# Altium PCB Intermediate_LCL_Revised.PcbDoc
Units mil, origin at the board's own origin, x right, y up, seen from the top; angles counter-clockwise.
Board outline 12850 x 6950 mil, 2 copper layers (Top Layer, Bottom Layer); 80 components, 67 nets, 326 pads, 24 vias.
Unrouted connection lines stored in the file: 23.
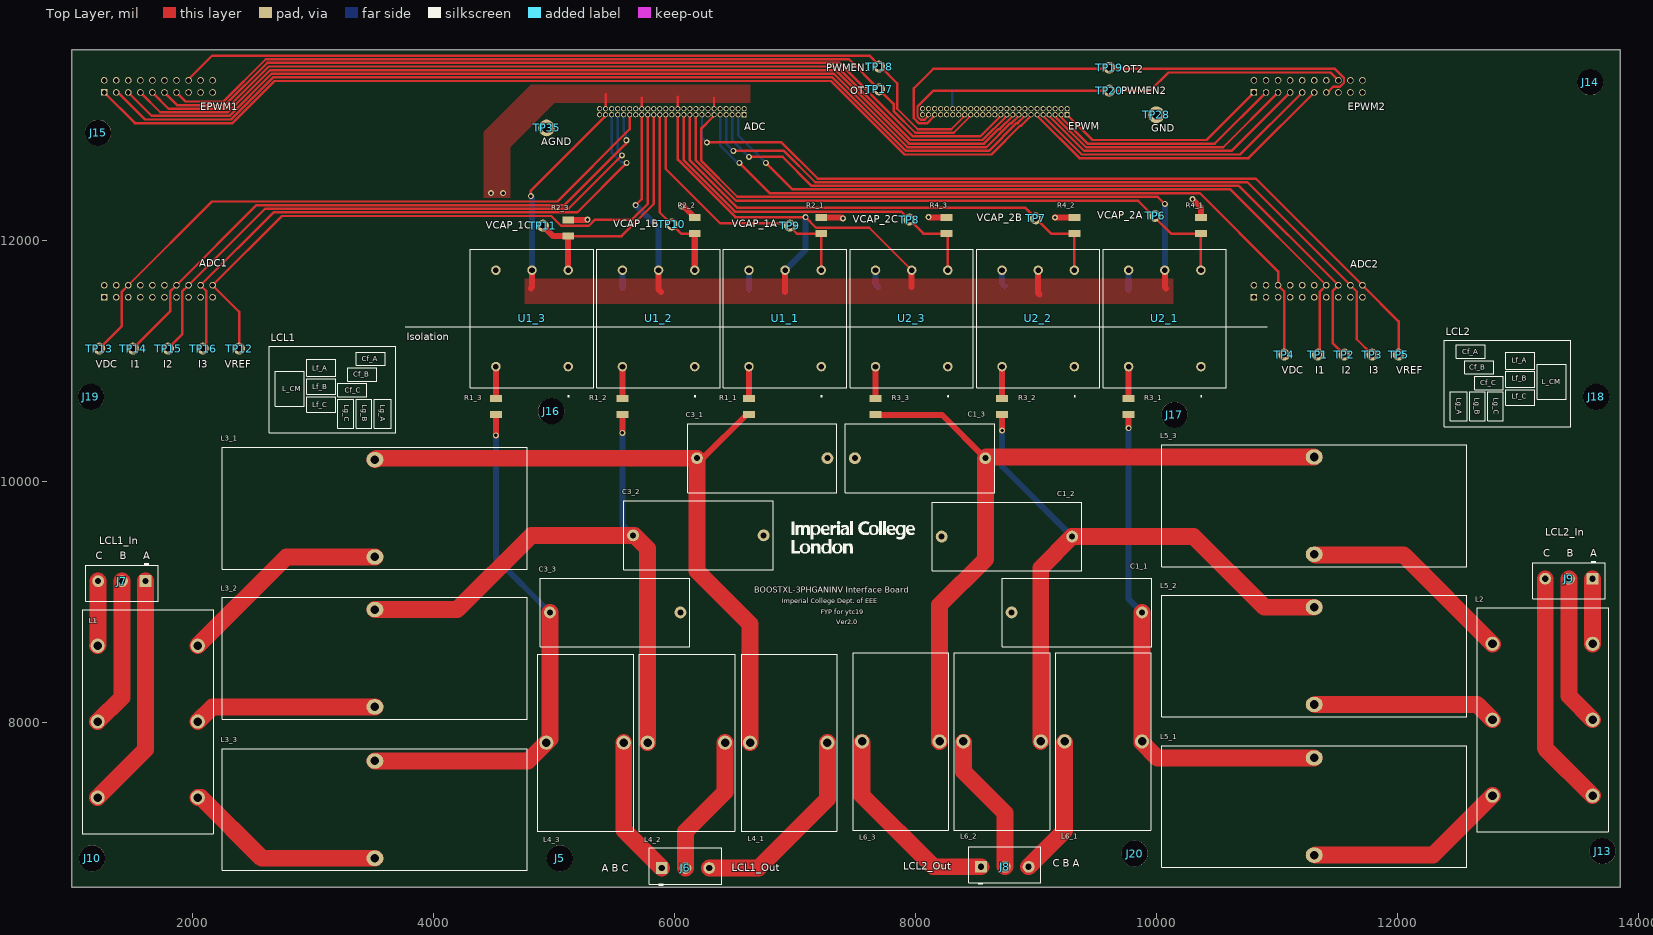
[diagram p0: Top Layer view]
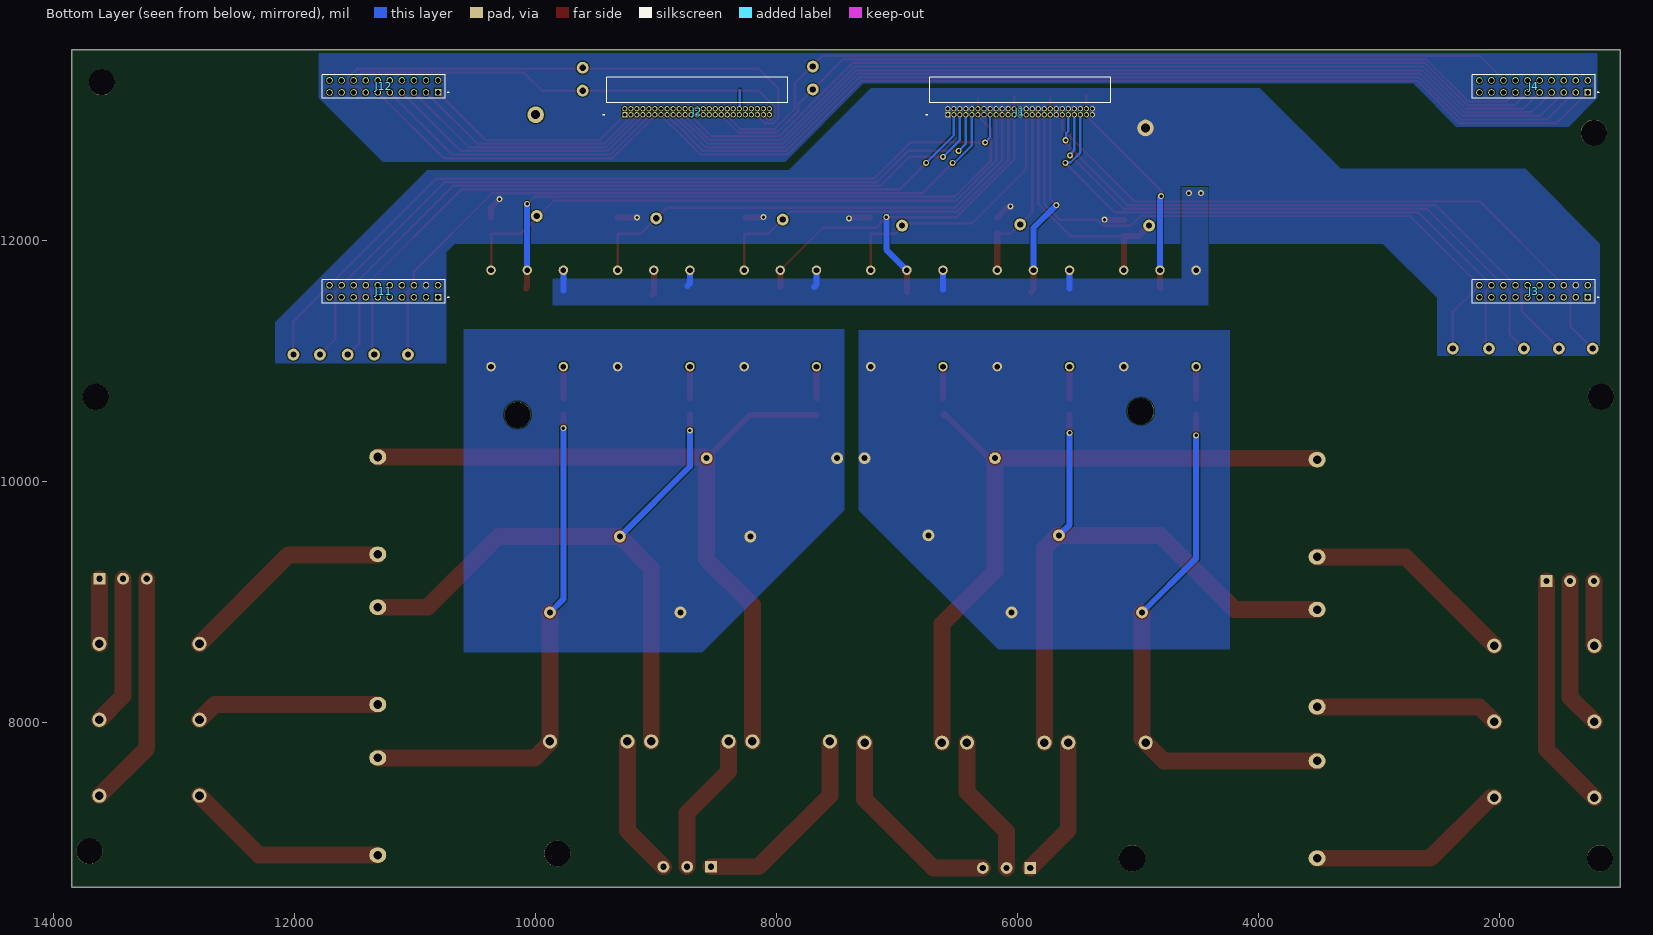
[diagram p1: Bottom Layer view, seen from below]
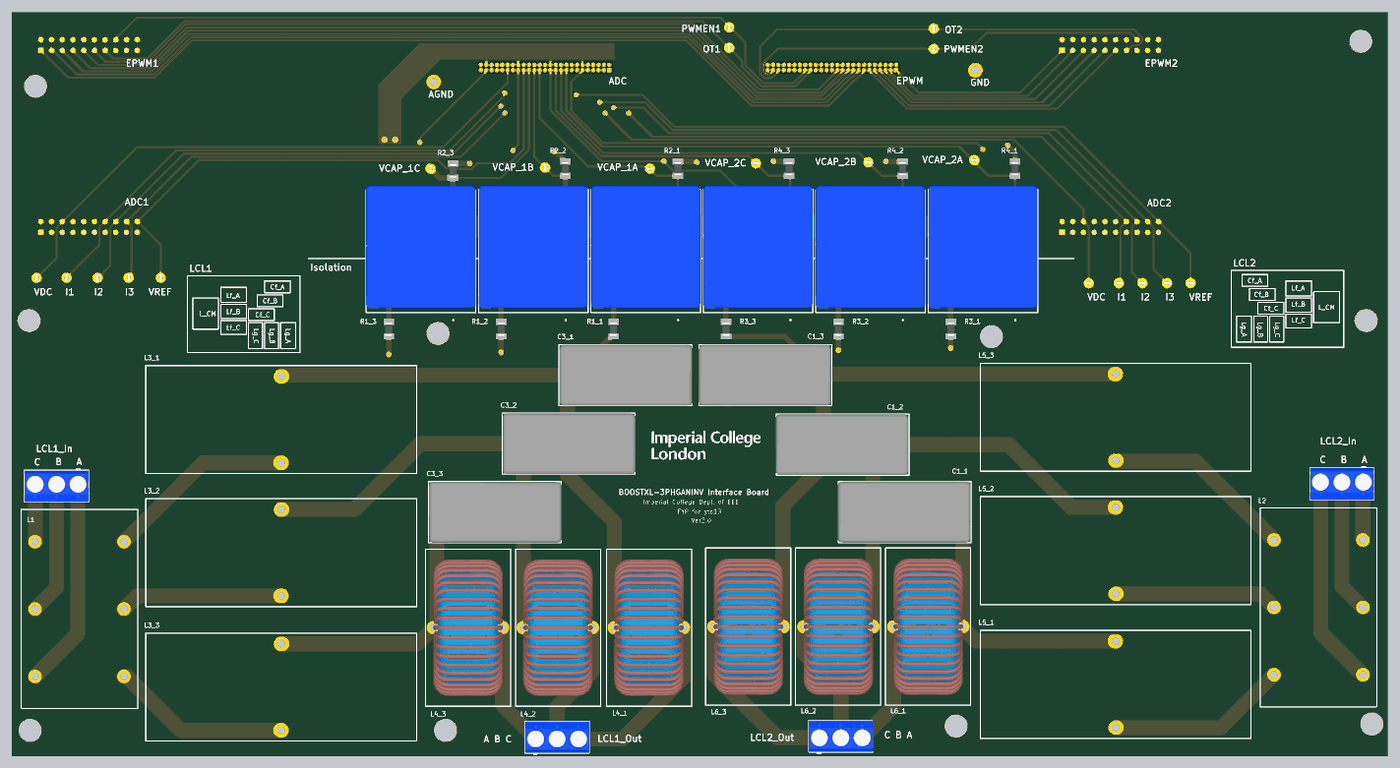
[diagram p2: 3D render of the assembled board from above, using the file's embedded part models]
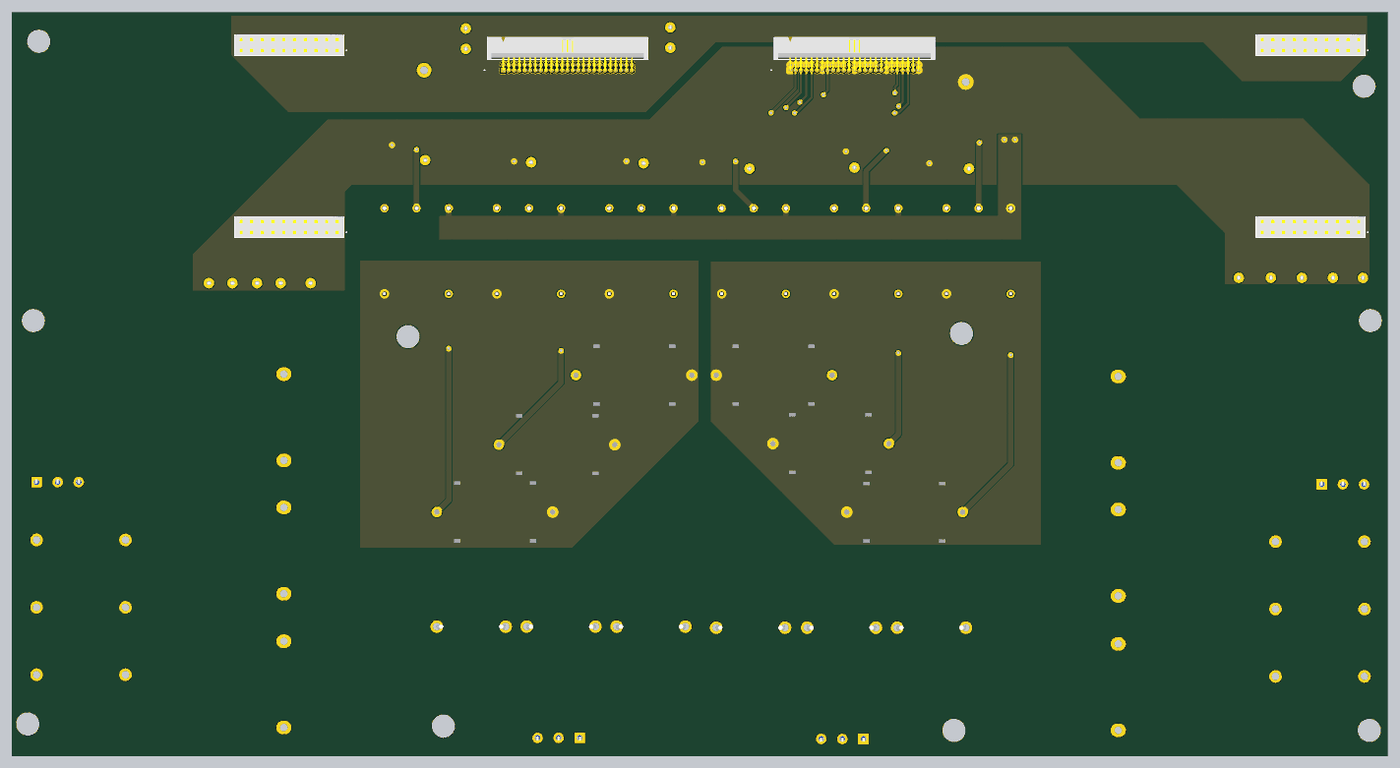
[diagram p3: 3D render of the assembled board from below, using the file's embedded part models]

## Layer stack, top to bottom
Top Solder: solder mask 0.4, Solder Resist, Dk 3.5
Top Layer: signal copper 1.4
Dielectric 1: dielectric 12.6, FR-4, Dk 4.8
Bottom Layer: signal copper 1.4
Bottom Solder: solder mask 0.4, Solder Resist, Dk 3.5

## Board outline
1000,6630 13850,6630 13850,13580 1000,13580

## Design rules (kind name [scope] priority, off if disabled: settings)
Clearance [All] p1: gap=10 ignorepadtopadclearanceinfootprint=FALSE except(0: Arc-Hole Track-Hole SMDPad-Hole THPad-Hole Via-Hole Fill-Hole Poly-Hole Region-Hole Text-Hole; 5: SMDPad-SMDPad SMDPad-THPad THPad-THPad)
Height [All] p1: minheight=0 maxheight=1500 prefheight=500
HoleSize [All] p1: absolutevalues=TRUE maxlimit=150 minlimit=1 maxpercent=80.000 minpercent=20.000
PolygonConnect [All] p1: connectstyle=Direct reliefconductorwidth=10 reliefentries=4 polygonreliefangle="90 Angle" airgapwidth=10
RoutingVias [All] p1: holewidth=28 width=50 viastyle="Through Hole" minholewidth=28 minwidth=50 maxholewidth=28 maxwidth=50
SolderMaskExpansion [All] p1: expansion=4 istentingtop=FALSE
Width [All] p1: maxlimit=140 minlimit=10 preferedwidth=10 minimp=50.000000 maximp=50.000000 favimp=50.000000
28 further rules are at their usual default settings.

## Classes and differential pairs
channel class LCL_2: LCL_21 LCL_22 LCL_23
net class V_termB_[1..3]: V_termB_1 V_termB_2 V_termB_3
net class V_termA_[1..3]: V_termA_1 V_termA_2 V_termA_3
net class V_o_outB_[1..3]: V_o_outB_1 V_o_outB_2 V_o_outB_3
net class V_o_outA_[1..3]: V_o_outA_1 V_o_outA_2 V_o_outA_3
net class V_capB_[1..3]: V_capB_1 V_capB_2 V_capB_3
net class V_capA_[1..3]: V_capA_1 V_capA_2 V_capA_3
component class LCL_23: C1_3 L5_3 L6_3 R3_3 R4_3 U2_3
component class LCL_22: C1_2 L5_2 L6_2 R3_2 R4_2 U2_2
component class LCL_21: C1_1 L5_1 L6_1 R3_1 R4_1 U2_1
channel class LCL_1: LCL_11 LCL_12 LCL_13
component class LCL_13: C3_3 C23 C33 L3_3 L4_3 R1_3 R2_3 R13 R33 R43 R53 U1_3
component class LCL_12: C3_2 C22 C32 L3_2 L4_2 R1_2 R2_2 R12 R32 R42 R52 U1_2
component class LCL_11: C3_1 C21 C31 L3_1 L4_1 R1_1 R2_1 R11 R31 R41 R51 U1_1
component class Intermediate_LCL_Top_20230320: J1 J2 J3 J4 J5 J6 J7 J8 J9 J10 J11 J12 J13 J14 J15 J16 J17 J18 J19 J20 L1 L2 TP1 TP2 TP3 TP4 TP5 TP6 TP7 TP8 TP9 TP10 TP11 TP12 TP13 TP14 TP15 TP16 TP17 TP18 TP19 TP20 TP28 TP35

## Components (designator, comment, footprint, x,y, rotation, side; value= is the part's Value field where it differs from the comment)
C1_1 "2.2uF_180V" "Film Capacitor PHE450HF7220JR06L2" 9340,8910 r90 top (schematic designator C1)
C1_2 "2.2uF_180V" "Film Capacitor PHE450HF7220JR06L2" 8760,9540 r90 top (schematic designator C1)
C1_3 "2.2uF_180V" "Film Capacitor PHE450HF7220JR06L2" 8040,10190 r90 top (schematic designator C1)
C3_1 "2.2uF_180V" "Film Capacitor PHE450HF7220JR06L2" 6730,10190 r270 top (schematic designator C3)
C3_2 "2.2uF_180V" "Film Capacitor PHE450HF7220JR06L2" 6200,9550 r270 top (schematic designator C3)
C3_3 "2.2uF_180V" "Film Capacitor PHE450HF7220JR06L2" 5510,8910 r270 top (schematic designator C3)
J1 "ADC" SHF-125-01-L-D-RA 5980,13065 r180 bottom
J2 "EPWM" SHF-125-01-L-D-RA 8660,13065 r180 bottom
J3 "ADC1" SSQ-110-03-T-D 1720,11575 r180 bottom
J4 "EPWM1" SSQ-110-03-T-D 1720,13275 r180 bottom
J5 "M5 Mounting Hole" "M5 Mounting Hole" 5050,6870 r0 top
J6 "LCL1_Out" "3 Pin Terminal" 6093.15,6790 r0 top
J7 "LCL1_In" "3 Pin Terminal" 1416.85,9170 r180 top
J8 "LCL2_Out" "3 Pin Terminal" 8743.15,6800 r0 top
J9 "LCL2_In" "3 Pin Terminal" 13423.15,9190 r180 top
J10 "M5 Mounting Hole" "M5 Mounting Hole" 1170,6870 r0 top
J11 "ADC2" SSQ-110-03-T-D 11260,11575 r180 bottom
J12 "EPWM2" SSQ-110-03-T-D 11260,13275 r180 bottom
J13 "M5 Mounting Hole" "M5 Mounting Hole" 13702.78,6929.75 r0 top
J14 "M5 Mounting Hole" "M5 Mounting Hole" 13600,13310 r0 top
J15 "M5 Mounting Hole" "M5 Mounting Hole" 1220,12890 r0 top
J16 "M5 Mounting Hole" "M5 Mounting Hole" 4980,10580 r0 top
J17 "M5 Mounting Hole" "M5 Mounting Hole" 10150,10550 r0 top
J18 "M5 Mounting Hole" "M5 Mounting Hole" 13650,10700 r0 top
J19 "M5 Mounting Hole" "M5 Mounting Hole" 1160,10700 r0 top
J20 "M5 Mounting Hole" "M5 Mounting Hole" 9820,6910 r0 top
L1 "30mH CM" "CM Choke Custom" 1631.06,8004.39 r0 top
L2 "30mH CM" "CM Choke Custom" 13204.65,8020 r180 top
L3_1 "4mH" "4mH Custom" 3515.71,9774.39 r90 top (schematic designator L3)
L3_2 "4mH" "4mH Custom" 3515.71,8530.84 r90 top (schematic designator L3)
L3_3 "4mH" "4mH Custom" 3515.71,7274.39 r90 top (schematic designator L3)
L4_1 "380uH" "380uH Custom" 6950,7830 r0 top (schematic designator L4)
L4_2 "380uH" "380uH Custom" 6100,7830 r0 top (schematic designator L4)
L4_3 "380uH" "380uH Custom" 5260,7830 r0 top (schematic designator L4)
L5_1 "4mH" "4mH Custom" 11310,7300 r90 top (schematic designator L5)
L5_2 "4mH" "4mH Custom" 11310,8550 r90 top (schematic designator L5)
L5_3 "4mH" "4mH Custom" 11310,9796.46 r90 top (schematic designator L5)
L6_1 "380uH" "380uH Custom" 9560,7840 r180 top (schematic designator L6)
L6_2 "380uH" "380uH Custom" 8720,7840 r180 top (schematic designator L6)
L6_3 "380uH" "380uH Custom" 7880,7840 r180 top (schematic designator L6)
R1_1 "8.2k_1206" "1206 Resistor" 6620,10620 r270 top (schematic designator R1)
R1_2 "8.2k_1206" "1206 Resistor" 5570,10620 r270 top (schematic designator R1)
R1_3 "8.2k_1206" "1206 Resistor" 4520,10620 r270 top (schematic designator R1)
R2_1 "130_1206" "1206 Resistor" 7220,12120 r270 top (schematic designator R2)
R2_2 "130_1206" "1206 Resistor" 6170,12120 r270 top (schematic designator R2)
R2_3 "130_1206" "1206 Resistor" 5120,12100 r270 top (schematic designator R2)
R3_1 "8.2k_1206" "1206 Resistor" 9770,10620 r270 top (schematic designator R3)
R3_2 "8.2k_1206" "1206 Resistor" 8720,10620 r270 top (schematic designator R3)
R3_3 "8.2k_1206" "1206 Resistor" 7670,10620 r270 top (schematic designator R3)
R4_1 "130_1206" "1206 Resistor" 10370,12120 r270 top (schematic designator R4)
R4_2 "130_1206" "1206 Resistor" 9320,12120 r270 top (schematic designator R4)
R4_3 "130_1206" "1206 Resistor" 8260,12120 r270 top (schematic designator R4)
TP1 "PCBTestpoint" "PCB 1.32mm TestPoint" 11340,11050 r0 top
TP2 "PCBTestpoint" "PCB 1.32mm TestPoint" 11560,11050 r0 top
TP3 "PCBTestpoint" "PCB 1.32mm TestPoint" 11790,11050 r0 top
TP4 "PCBTestpoint" "PCB 1.32mm TestPoint" 11060,11050 r0 top
TP5 "PCBTestpoint" "PCB 1.32mm TestPoint" 12010,11050 r0 top
TP6 "VCAP_2A" "PCB 1.32mm TestPoint" 9990,12200 r0 top
TP7 "VCAP_2B" "PCB 1.32mm TestPoint" 9000,12180 r0 top
TP8 "VCAP_2C" "PCB 1.32mm TestPoint" 7950,12170 r0 top
TP9 "VCAP_1A" "PCB 1.32mm TestPoint" 6960,12120 r0 top
TP10 "VCAP_1B" "PCB 1.32mm TestPoint" 5980,12130 r90 top
TP11 "VCAP_1C" "PCB 1.32mm TestPoint" 4910,12120 r90 top
TP12 "PCBTestpoint" "PCB 1.32mm TestPoint" 2390,11100 r90 top
TP13 "PCBTestpoint" "PCB 1.32mm TestPoint" 1230,11100 r90 top
TP14 "PCBTestpoint" "PCB 1.32mm TestPoint" 1510,11100 r90 top
TP15 "PCBTestpoint" "PCB 1.32mm TestPoint" 1800,11100 r90 top
TP16 "PCBTestpoint" "PCB 1.32mm TestPoint" 2090,11100 r90 top
TP17 "OT1" "PCB 1.32mm TestPoint" 7700,13250 r90 top
TP18 "PWMEN1" "PCB 1.32mm TestPoint" 7700,13440 r90 top
TP19 "OT2" "PCB 1.32mm TestPoint" 9610,13430 r90 top
TP20 "PWMEN2" "PCB 1.32mm TestPoint" 9610,13240 r90 top
TP28 "GND" "1.9mm Hole" 10000,13040 r90 top
TP35 "AGND" "1.9mm Hole" 4940,12930 r90 top
U1_1 "LV25P" LV-25-P 6920,11350 r90 top (schematic designator U1)
U1_2 "LV25P" LV-25-P 5870,11350 r90 top (schematic designator U1)
U1_3 "LV25P" LV-25-P 4820,11350 r90 top (schematic designator U1)
U2_1 "LV25P" LV-25-P 10070,11350 r90 top (schematic designator U2)
U2_2 "LV25P" LV-25-P 9020,11350 r90 top (schematic designator U2)
U2_3 "LV25P" LV-25-P 7970,11350 r90 top (schematic designator U2)

## Footprints (in the part's own frame and the unit in brackets; to place one, negate y for a bottom-side part, rotate by r counter-clockwise, add the part's x,y. Pads: shape width x height; smd on the part's side, far side on the other; paste and mask are expansions set on the pad)
"1.9mm Hole" [mm] "Through hole terminal pin"
  round 3.5 hole 1.9: 1(0,0)
"3 Pin Terminal" [mm] "WURTH ELEKTRONIK 691102710003"
  rect 2.5x2.5 hole 1.3: 1(-5,0)
  round 2.5 hole 1.3: 2(0,0) 3(5,0)
  silkscreen extent -7.63,-3.78 7.61,4.22, body extent -7.63,-3.3 7.61,4.2, height 10
"4mH Custom" [mm] "4mH Custom"
  oval 3.2x3.6 hole 1.8: 1(-10.25,0) 2(10.25,0)
  silkscreen extent -12.83,-32.13 12.83,32.13
"380uH Custom" [mm] "380uH Custom"
  round 3 hole 1.8: 1(-8.16,0) 2(8.16,0)
  silkscreen extent -10.03,-18.67 10.16,18.67, body extent -8.25,-16.21 8.25,16.21, height 34.1
"1206 Resistor" [mm]
  rect 1.5x2.5 smd: 1(-1.7,0) 2(1.7,0)
  body extent -1.55,-0.8 1.55,0.8, height 0.65
"CM Choke Custom" [mm] "CM Choke Custom"
  round 3 hole 1.8: 1(-10.55,16) 2(-10.55,0) 3(-10.55,-16) 4(10.55,16) 5(10.55,0) 6(10.55,-16)
  silkscreen extent -13.84,-23.62 13.84,23.62
"Film Capacitor PHE450HF7220JR06L2" [mm] "KEMET PHE450 Metallised Polypropylene Film Capacitor, 180 V ac, 250 V dc, ±5%, 2.2µF, Through Hole"
  round 2.5 hole 1.27: 1(0,13.75) 2(0,-13.75)
  silkscreen extent -7.25,-15.75 7.25,15.75, body extent -7.24,-15.62 7.26,15.88, height 24.01
LV-25-P [mm]
  round 2 hole 1.2: 1(-10.16,-7.62) 2(10.16,-7.62) 3(10.16,0) 4(10.16,7.62) 5(-10.16,7.62)
  silkscreen extent -16.54,-13 14.6,13, body extent -13.6,-13 15.6,13, height 16.4
"M5 Mounting Hole" [mm] "M5 Mounting Hole"
  round 5.5 hole 5.5: 1(0,0)
"PCB 1.32mm TestPoint" [mm] "20-313143 PCB Test Point, White, Through Hole Mount, 1.32 mm, Phosphor Bronze, Tin Plated Contacts"
  round 2.5 hole 1.32: 1(0,0)
  body extent -1.15,-1.15 1.15,1.15, height 5
SHF-125-01-L-D-RA [mm] "50-Pin Simplus Connector"
  rect 1.09x1.09 hole 0.74 mask+0.381: 01(-15.24,-0.635)
  round 1.09 hole 0.74 mask+0.381: 02(-15.24,0.635) 03(-13.97,-0.635) 04(-13.97,0.635) 05(-12.7,-0.635) 06(-12.7,0.635) 07(-11.43,-0.635) 08(-11.43,0.635) 09(-10.16,-0.635) 10(-10.16,0.635) 11(-8.89,-0.635) 12(-8.89,0.635) 13(-7.62,-0.635) 14(-7.62,0.635) 15(-6.35,-0.635) 16(-6.35,0.635) 17(-5.08,-0.635) 18(-5.08,0.635) 19(-3.81,-0.635) 20(-3.81,0.635) 21(-2.54,-0.635) 22(-2.54,0.635) 23(-1.27,-0.635) 24(-1.27,0.635) 25(0,-0.635) 26(0,0.635) 27(1.27,-0.635) 28(1.27,0.635) 29(2.54,-0.635) 30(2.54,0.635) 31(3.81,-0.635) 32(3.81,0.635) 33(5.08,-0.635) 34(5.08,0.635) 35(6.35,-0.635) 36(6.35,0.635) 37(7.62,-0.635) 38(7.62,0.635) 39(8.89,-0.635) 40(8.89,0.635) 41(10.16,-0.635) 42(10.16,0.635) 43(11.43,-0.635) 44(11.43,0.635) 45(12.7,-0.635) 46(12.7,0.635) 47(13.97,-0.635) 48(13.97,0.635) 49(15.24,-0.635) 50(15.24,0.635)
  silkscreen extent -19.8,-0.73 19.05,7.23, body extent -19.05,-0.84 19.05,7.24, height 5.59
SSQ-110-03-T-D [mm] "Headers & Wire Housings Tiger Buy Socket Strip with Square Tails, 0.100\" Pitch"
  rect 1.37x1.37 hole 1.02: 01(11.43,-1.27)
  round 1.37 hole 1.02: 02(11.43,1.27) 03(8.89,-1.27) 04(8.89,1.27) 05(6.35,-1.27) 06(6.35,1.27) 07(3.81,-1.27) 08(3.81,1.27) 09(1.27,-1.27) 10(1.27,1.27) 11(-1.27,-1.27) 12(-1.27,1.27) 13(-3.81,-1.27) 14(-3.81,1.27) 15(-6.35,-1.27) 16(-6.35,1.27) 17(-8.89,-1.27) 18(-8.89,1.27) 19(-11.43,-1.27) 20(-11.43,1.27)
  silkscreen extent -12.96,-2.47 13.7,2.47, body extent -12.95,-2.48 12.95,2.48, height 8.52

## Part data
C1_1 C1_2 C1_3 C3_1 C3_2 C3_3: library part PHE450HF7220JR06L2, "KEMET PHE450 Metallised Polypropylene Film Capacitor, 180 V ac, 250 V dc, ±5%, 2.2μF, Through Hole", Manufacturer_Name=KEMET, Datasheet Link=https://docs.rs-online.com/a458/0900766b817170df.pdf, Height=24.5mm, Manufacturer_Part_Number=PHE450HF7220JR06L2
J1 J2: library part SHF-125-01-L-D-RA, "50-Pin Simplus Connector", Package=None, Availability=Unavailable, MF=Samtec, MP=SHF-125-01-L-D-RA, Price=None
J3 J4 J11 J12: library part SSQ-110-03-T-D, "SSQ - Samtec 2.54mm Square Tail Dual Row Socket Strip 8.5mm Profile - Fast Stock", Package=None, Availability="In Stock", Check_prices=https://www.snapeda.com/parts/SSQ-110-03-T-D/Samtec%20Inc./view-part/616109/?ref=eda, MF="Samtec Inc.", MP=SSQ-110-03-T-D, Price=None, Purchase-URL=https://pricing.snapeda.com/search/part/SSQ-110-03-T-D/?ref=eda, SnapEDA_Link=https://www.snapeda.com/parts/SSQ-110-03-T-D/Samtec%20Inc./view-part/616109/?ref=snap
J6 J7 J8 J9: library part 3PinTerminal, "3 Position Terminal Block 5.08mm", Digikey Part Number=ED2610-ND, Manufacturer="On Shore Technology", Package=HDR03, Part Number=OSTTC032162, Temperature="-30°C to +105°C", Temperature Range High=+105°C, Temperature Range Low=-30°C, Voltage=300V, ComponentLink1Description=Upverter, ComponentLink1URL=https://upverter.com/upn/revision/2b80058b23306b34/, ComponentLink2Description=Datasheet, ComponentLink2URL=https://upverter.com/datasheet/d9a5d2e095ec14efdc364e45047c257fc4ca76eb.pdf, Digikey Description="CONN TERM BLOCK 5.08MM VERT 3POS PCB", helpURL=https://upverter.com/upn/revision/2b80058b23306b34/, Is Female=yes, Lead Free=yes, Price=0.382016875697, RoHS=TRUE, Supplier 1=Digi-Key, Supplier 2=Mouser, Supplier Part Number 1=ED2610-ND
L1 L2: library part "30mH Custom CM Choke", "30mH Custom CM Choke", Manufacturer_Name="Wurth Elektronik", Manufacturer_Part_Number=744839029220, Mouser Part Number=710-744839029220, Datasheet Link=https://componentsearchengine.com//744839029220.pdf, Height=39mm, Mouser Price/Stock=https://www.mouser.co.uk/ProductDetail/Wurth-Elektronik/744839029220?qs=MoCBKJu1Jj15mDhjF%2F4U%252Bg%3D%3D
L3_1 L3_2 L3_3 L5_1 L5_2 L5_3: library part "4mH Custom Inductor"
L4_1 L4_2 L4_3 L6_1 L6_2 L6_3: library part "380uH Custom Inductor"
R1_1 R1_2 R1_3 R3_1 R3_2 R3_3: library part CRG1206F8K2, "SMD Chip Resistor, 8.2 kohm, ± 5%, 500 mW, 1206 [3216 Metric], Thick Film, General Purpose", Package="6432 Stackpole", Availability=Good, DigiKey-Purchase-URL=https://snapeda.com/shop?store=DigiKey&id=836123, MF=Bourns, Mouser-Purchase-URL=https://snapeda.com/shop?store=Mouser&id=836123, MP=CRE2512-FZ-R007E-3, Price=None, SnapEDA_Link=https://www.snapeda.com/parts/CRE2512-FZ-R007E-3/Bourns/view-part/836123/?ref=snap
R2_1 R2_2 R2_3 R4_1 R4_2 R4_3: library part CRCW1206130RFKEA, "SMD Chip Resistor, 130 ohm, ± 1%, 250 mW, 1206 [3216 Metric], Thick Film, General Purpose", Package="6432 Stackpole", Availability=Good, DigiKey-Purchase-URL=https://snapeda.com/shop?store=DigiKey&id=836123, MF=Bourns, Mouser-Purchase-URL=https://snapeda.com/shop?store=Mouser&id=836123, MP=CRE2512-FZ-R007E-3, Price=None, SnapEDA_Link=https://www.snapeda.com/parts/CRE2512-FZ-R007E-3/Bourns/view-part/836123/?ref=snap
TP1 TP2 TP3 TP4 TP5 TP12 TP13 TP14 TP15 TP16: "20-313143 PCB Test Point, White, Through Hole Mount, 1.32 mm, Phosphor Bronze, Tin Plated Contacts"
TP6 TP7 TP8 TP9 TP10 TP11 TP17 TP18 TP19 TP20: library part PCBTestpoint, "20-313143 PCB Test Point, White, Through Hole Mount, 1.32 mm, Phosphor Bronze, Tin Plated Contacts"
TP28 TP35: library part GroundTestPoint, "H2182-01 PCB Test Point, PCB Mount, 1.9 mm, Brass, Tin Plated Contacts"
U1_1 U1_2 U1_3 U2_1 U2_2 U2_3: "Undefined or Miscellaneous", Manufacturer_Name=LEM, Manufacturer_Part_Number=LV25P

## Via types
v1: diameter 50, hole 28, Top Layer to Bottom Layer, 24 vias

## Nets (pads, with @x,y where several pads share a name; then routed paths per layer and width w, separated by ;. In a path a pad name is that pad's centre, name@x,y a point inside that pad or via, vN(x,y) a via of type N, cw(c..) or ccw(c..) an arc to the next point about the centre after c; other vN are vias at no path point)
+15V: J1.11 J1.23 J1.35 J1.47 U1_1.3 U1_2.3 U1_3.3 U2_1.3 U2_2.3 U2_3.3 | length 12138.1
  Top Layer w20: v1(4810,12365) 4810,12410 5421.46,13021.46 5421.46,13025.26 5430,13033.8 J1.47 ; v1(5680,12290) 5730,12340 J1.35 ; J1.23 6030,12667.57 6507.57,12190 v1(7090,12190) 7177.4,12102.6 7617.4,12102.6 U2_3.3 ; J1.11 6321.46,13040 6321.46,13022.83 6225,12926.37 6225,12657.43 6522.43,12360 10010,12360 v1(10070,12300)
  Top Layer w50: 4810,11600 4820,11610 U1_3.3 ; U1_2.3 5870,11590 5890,11570 ; 6920,11570 U1_1.3 ; 7970,11610 U2_3.3 ; U2_2.3 9020,11560 9030,11550 ; U2_1.3 10070,11610 10080,11600
  Bottom Layer w50: v1(4810,12365) 4820,12355 U1_3.3 ; v1(5680,12290) 5870,12100 U1_2.3 ; U1_1.3 7090,11920 v1(7090,12190) ; U2_1.3 v1(10070,12300)
-15V: J1.12 J1.24 J1.36 J1.48 U1_1.4 U1_2.4 U1_3.4 U2_1.4 U2_2.4 U2_3.4 | length 1166.6
  Top Layer w20: J1.48 5430,13210 ; J1.36 5730,13180 ; J1.24 6030,13190 ; J1.12 6330,13180
  Top Layer w50: U2_2.4 U2_2.4@8720.43,11749.57
  Bottom Layer w50: 5570,11600 U1_2.4 ; 6620,11590 U1_1.4 ; U2_3.4 7670,11630 7690,11610 ; U2_2.4@8720.43,11749.57 8720.43,11639.57 8740,11620 ; 9770,11580 U2_1.4
  other v1: 4480,12390 4580,12390
AGND: J1.01 J1.02 J1.04 J1.06 J1.08 J1.10 J1.13 J1.14 J1.16 J1.18 J1.20 J1.22 J1.25 J1.26 J1.28 J1.30 J1.32 J1.34 J1.37 J1.38 J1.40 J1.42 J1.44 J1.46 J1.49 J1.50 J2.02 J2.04 J2.06 J2.08 J2.10 J2.12 J2.14 J2.16 J2.18 J2.20 J2.22 J2.24 J2.26 J2.28 J2.30 J2.32 J2.34 J2.36 J2.38 J2.40 J3.04 J4.02 J11.04 J12.02 R2_1.1 R2_2.1 R2_3.1 R4_1.1 R4_2.1 R4_3.1 TP28.1 TP35.1 | length 1141.8
  Top Layer w50: R2_3.1 5276.93,12166.93 v1(5280,12170) ; v1(6060,12280) 6076.93,12280 R2_2.1 ; R2_1.1 7393.07,12186.93 v1(7400,12180) ; v1(8110,12190) 8113.07,12186.93 R4_3.1 ; v1(9159.39,12187.74) 9160.2,12186.93 R4_2.1 ; v1(10300,12340) 10370,12270 R4_1.1
  Bottom Layer w20: 8305.62,13243.01 8305.62,13094.38 J2.40
C1_Neut: C3_1.1 C3_2.1 C3_3.1 U1_1.1 U1_2.1 U1_3.1
C2_Neut: C1_1.1 C1_2.1 C1_3.1 U2_1.1 U2_2.1 U2_3.1
EPWM1A: J2.01 J12.01 | length 1800.6
  Top Layer w20: J2.01 9470,12830 10415,12830 J12.01
EPWM1B: J2.03 J12.03 | length 1987.9
  Top Layer w20: J2.03 9214.38,13035.62 9214.38,13014.42 9428.8,12800 10485,12800 J12.03
EPWM2A: J2.05 J12.05 | length 2158.3
  Top Layer w20: J2.05 9164.38,13035.62 9164.38,13021.99 9416.38,12770 10555,12770 J12.05
EPWM2B: J2.07 J12.07 | length 2330.2
  Top Layer w20: J2.07 9110,13033.8 9118.54,13025.26 9118.54,13022.83 9401.37,12740 10625,12740 J12.07
EPWM3A: J2.09 J12.09 | length 2505.1
  Top Layer w20: J2.09 9060,13033.8 9068.54,13025.26 9068.54,13022.83 9381.37,12710 10695,12710 J12.09
EPWM3B: J2.11 J12.11 | length 2679.9
  Top Layer w20: J2.11 9010,13033.8 9018.54,13025.26 9018.54,13022.83 9361.37,12680 10765,12680 J12.11
EPWM4A: J2.13 J4.01 | length 8335
  Top Layer w20: J4.01 1525,12970 2334.56,12970 2684.56,13320 7300,13320 7910,12710 8631.06,12710 8871.06,12950 8878.63,12950 8951.46,13022.83 8951.46,13025.26 8960,13033.8 J2.13
EPWM4B: J2.15 J4.03 | length 8160.2
  Top Layer w20: J4.03 1379.18,13225 1391.97,13212.22 1397.78,13212.22 1610,13000 2322.13,13000 2672.13,13350 7312.43,13350 7922.43,12740 8611.06,12740 8841.06,12970 8848.63,12970 8901.46,13022.83 8901.46,13025.26 8910,13033.8 J2.15
EPWM5A: J2.17 J4.05 | length 7985.3
  Top Layer w20: J4.05 1665,13030 2309.71,13030 2659.71,13380 7324.85,13380 7934.85,12770 8591.06,12770 8791.06,12970 8798.63,12970 8851.46,13022.83 8851.46,13025.26 8860,13033.8 J2.17
EPWM5B: J2.19 J4.07 | length 7810.5
  Top Layer w20: J4.07 1735,13060 2297.28,13060 2647.28,13410 7337.28,13410 7947.28,12800 8571.06,12800 8691.74,12920.69 8699.31,12920.69 8805.62,13026.99 8805.62,13035.62 J2.19
EPWM6A: J2.21 J4.09 | length 7635.6
  Top Layer w20: J4.09 1805,13090 2284.85,13090 2634.85,13440 7350,13440 7960,12830 8558.63,12830 8751.46,13022.83 8751.46,13025.26 8760,13033.8 J2.21
EPWM6B: J2.23 J4.11 | length 7460.8
  Top Layer w20: J4.11 1875,13120 2272.43,13120 2622.43,13470 7370,13470 7980,12860 8538.63,12860 8705.62,13026.99 8705.62,13035.62 J2.23
I_lA_1: J1.41 J3.14 TP14.1 | length 5140.6
  Top Layer w20: TP14.1 1816.97,11406.97 1816.97,11571.97 J3.14 2535,12290 5090,12290 5596.11,12796.11 5596.11,12822.47 v1(5601.82,12828.18)
  Bottom Layer w20: J1.41 5580,12903.15 5599.97,12883.18 5599.97,12830.03 v1(5601.82,12828.18)
I_lA_2: J1.43 J3.16 TP15.1 | length 4990.9
  Top Layer w20: TP15.1 1916.97,11216.97 1916.97,11571.97 J3.16 2605,12260 5123.64,12260 v1(5566.82,12703.18)
  Bottom Layer w20: J1.43 5530,12748.12 5566.82,12711.3 v1(5566.82,12703.18)
I_lA_3: J1.45 J3.18 TP16.1 | length 4985.5
  Top Layer w20: TP16.1 2090,11115.9 2116.97,11142.86 2116.97,11578.03 J3.18 2675,12230 5195,12230 v1(5605,12640)
  Bottom Layer w20: J1.45 5480,12726.36 5560.62,12645.74 5599.26,12645.74 v1(5605,12640)
I_lB_1: J1.03 J11.14 TP1.1 | length 6169.7
  Top Layer w20: v1(6760,12640) 6980,12420 10615,12420 J11.14 11356.97,11571.97 11356.97,11091.09 11351.24,11085.36 11351.24,11061.24 TP1.1
  Bottom Layer w20: J1.03 6530,12870 v1(6760,12640)
I_lB_2: J1.05 J11.16 TP2.1 | length 6374
  Top Layer w20: v1(6620,12690) 6900,12690 7140,12450 10685,12450 J11.16 11463.03,11578.03 11463.03,11146.97 TP2.1
  Bottom Layer w20: J1.05 6480,12829.55 6619.55,12690 v1(6620,12690)
I_lB_3: J1.07 J11.18 TP3.1 | length 6556.3
  Top Layer w20: v1(6490,12740) 6910,12740 7170,12480 10755,12480 J11.18 11663.03,11571.97 11663.03,11176.97 TP3.1
  Bottom Layer w20: J1.07 6430,12800 v1(6490,12740)
NetC1_1_2: C1_1.2 L5_1.2 L6_1.1 R3_1.2 | length 4250.3
  Top Layer w50: v1(9770,10440) R3_1.2
  Top Layer w140: C1_1.2 9881.26,8909.92 9881.26,7830 10007.72,7703.54 L5_1.2
  Bottom Layer w50: v1(9770,10440) 9770,9021.34 C1_1.2
NetC1_2_2: C1_2.2 L5_2.2 L6_2.1 R3_2.2 | length 5313.2
  Top Layer w50: v1(8720,10420) R3_2.2
  Top Layer w140: L6_2.1 9041.26,9279.92 C1_2.2 10310,9540 10896.46,8953.54 L5_2.2
  Bottom Layer w50: v1(8720,10420) 8720,10121.34 C1_2.2
NetC1_3_2: C1_3.2 L5_3.2 L6_3.1 R3_3.2 | length 6300.7
  Top Layer w50: R3_3.2@7670,10550 8221.34,10550 C1_3.2
  Top Layer w140: L6_3.1 8201.26,8971.26 8581.34,9351.34 C1_3.2 8591.34,10200 L5_3.2
NetC3_1_2: C3_1.2 L3_1.2 L4_1.1 R1_1.2 | length 5806.3
  Top Layer w50: C3_1.2 6191.9,10193.24 6240.48,10193.24 6600.31,10553.07 R1_1.2 R1_1.2@6616.93,10550
  Top Layer w140: L3_1.2 3527.78,10190 C3_1.2 6188.66,9254.37 6628.74,8814.29 L4_1.1
NetC3_2_2: C3_2.2 L3_2.2 L4_2.1 R1_2.2 | length 5202.8
  Top Layer w50: v1(5570,10400) R1_2.2
  Top Layer w140: L3_2.2 4199.38,8934.39 4814.99,9550 C3_2.2 ; C3_2.2@5670,9550 5778.74,9441.26 L4_2.1
  Bottom Layer w50: v1(5570,10400) 5570,9638.66 C3_2.2
NetC3_3_2: C3_3.2 L3_3.2 L4_3.1 R1_3.2 | length 4407.3
  Top Layer w50: v1(4520,10380) R1_3.2
  Top Layer w140: L3_3.2 4786.67,7677.93 L4_3.1 4968.66,7859.92 C3_3.2
  Bottom Layer w50: v1(4520,10380) 4520,9358.66 C3_3.2
NetJ7_1: J7.1 L1.3 | length 1960.4
  Top Layer w140: L1.3 1613.7,7772.46 J7.1
NetJ7_2: J7.2 L1.2 | length 1248.9
  Top Layer w140: L1.2 1416.85,8205.53 J7.2
NetJ7_3: J7.3 L1.1 | length 537.5
  Top Layer w140: L1.1 1220,8638.6 J7.3
NetJ9_1: J9.1 L2.3 | length 540.1
  Top Layer w140: L2.3 J9.1
NetJ9_2: J9.2 L2.2 | length 1251.5
  Top Layer w140: J9.2 13423.15,8216.85 L2.2
NetJ9_3: J9.3 L2.1 | length 1963
  Top Layer w140: J9.3 13226.3,7783.78 L2.1
NetR1_1_1: R1_1.1 U1_1.5 | length 263.1
  Top Layer w50: R1_1.1 U1_1.5
NetR1_2_1: R1_2.1 U1_2.5 | length 263.1
  Top Layer w50: R1_2.1 U1_2.5
NetR1_3_1: R1_3.1 U1_3.5 | length 263.1
  Top Layer w50: R1_3.1 U1_3.5
NetR3_1_1: R3_1.1 U2_1.5 | length 263.1
  Top Layer w50: R3_1.1 U2_1.5
NetR3_2_1: R3_2.1 U2_2.5 | length 263.1
  Top Layer w50: R3_2.1 U2_2.5
NetR3_3_1: R3_3.1 U2_3.5 | length 263.1
  Top Layer w50: R3_3.1 U2_3.5
PCB_OT_1: J2.33 J4.13 TP17.1 | length 7121
  Top Layer w20: J4.13 1945,13150 2260,13150 2610,13500 7450,13500 TP17.1 7820,13130 7820,13070 8000,12890 8318.63,12890 8451.46,13022.83 8451.46,13025.26 8460,13033.8 J2.33
PCB_OT_2: J2.45 J12.13 TP19.1 | length 4358
  Top Layer w20: J2.45 8160,13033.8 8151.46,13025.26 8151.46,13022.83 8097.17,12968.54 8066.31,12968.54 8030.4,12968.54 7988.54,13010.4 7988.54,13046.31 7988.54,13259.6 8148.95,13420 9880,13420 9990,13420 11481.42,13420 11556.97,13344.45 11556.97,13305.55 11523.39,13271.97 11466.15,13271.97 11419.18,13225 J12.13
PWM_EN_1: J2.35 J4.16 TP18.1 | length 6966.4
  Top Layer w20: J4.16 1970,13333.85 2166.15,13530 7620,13530 7700,13450 TP18.1 7710,13440 7850,13300 7850,13090 8020,12920 8298.63,12920 8401.46,13022.83 8401.46,13025.26 8410,13033.8 J2.35
PWM_EN_2: J2.47 J12.16 TP20.1 | length 3843.6
  Top Layer w20: J2.47 8110,13033.8 8101.46,13025.26 8101.46,13022.83 8077.17,12998.54 8042.83,12998.54 8018.54,13022.83 8018.54,13107.17 8151.37,13240 9880,13240 9950,13240 10100,13390 11445,13390 J12.16
V_capA_1: J1.27 R2_1.2 TP9.1 U1_1.2 | length 2265.5
  Top Layer w20: J1.27 5930,12590 6380,12140 6924.1,12140 6949.1,12115 6955,12115 7016.93,12053.07 R2_1.2 U1_1.2
V_capA_2: J1.29 R2_2.2 TP10.1 U1_2.2 | length 1476.4
  Top Layer w20: J1.29 5880,12230 TP10.1 6056.93,12053.07 R2_2.2
  Top Layer w50: U1_2.2 R2_2.2
V_capA_3: J1.31 R2_3.2 TP11.1 U1_3.2 | length 2089.6
  Top Layer w20: R2_3.2 5563.07,12033.07 5830,12300 J1.31
  Top Layer w50: TP11.1 4996.93,12033.07 R2_3.2 U1_3.2
V_capB_1: J1.17 R4_1.2 TP6.1 U2_1.2 | length 5124.5
  Top Layer w20: J1.17 6180,12660 6514.46,12325.54 9850,12325.54 9977.77,12197.77 10007.77,12167.77 10122.47,12053.07 R4_1.2 U2_1.2
V_capB_2: J1.19 R4_2.2 TP7.1 U2_2.2 | length 4124.5
  Top Layer w20: J1.19 6130,12660 6523.54,12266.46 8913.54,12266.46 9126.93,12053.07 R4_2.2 U2_2.2
V_capB_3: J1.21 R4_3.2 TP8.1 U2_3.2 | length 3110.1
  Top Layer w20: J1.21 6080,12660 6503.54,12236.46 7883.54,12236.46 8066.93,12053.07 R4_3.2 ; U2_3.2 R4_3.2@8270,12043.07
  Bottom Layer w50: U2_3.2@8266.01,11753.99 U2_3.2
V_o_outA_1: J6.3 L4_1.2 | length 1686.6
  Top Layer w140: J6.3 6700,6790 7271.26,7361.26 L4_1.2
V_o_outA_2: J6.2 L4_2.2 | length 1175.9
  Top Layer w140: J6.2 6093.15,7093.15 6421.26,7421.26 L4_2.2
V_o_outA_3: J6.1 L4_3.2 | length 1170.5
  Top Layer w140: L4_3.2 5581.26,7105.04 J6.1
V_o_outB_1: J8.3 L6_1.2 | length 1153.7
  Top Layer w140: J8.3 9238.74,7098.74 L6_1.2@9238.74,7830
V_o_outB_2: J8.2 L6_2.2 | length 1172.7
  Top Layer w140: L6_2.2@8398.74,7830 8398.74,7591.26 8743.15,7246.85 J8.2
V_o_outB_3: J8.1 L6_3.2 | length 1671.2
  Top Layer w140: L6_3.2@7558.74,7830 7558.74,7391.26 8150,6800 J8.1
V_termA_1: L1.4 L3_1.1 | length 1774.4
  Top Layer w140: L1.4 2782.95,9370.84 L3_1.1
V_termA_2: L1.5 L3_2.1 | length 1520.2
  Top Layer w140: L1.5 2169.33,8127.3 L3_2.1
V_termA_3: L1.6 L3_3.1 | length 1677.9
  Top Layer w140: L1.6 2073.98,7374.46 2577.6,6870.84 L3_3.1
V_termB_1: L2.4 L5_1.1 | length 1673.8
  Top Layer w140: L5_1.1@11320,6896.46 12295.67,6896.46 L2.4
V_termB_2: L2.5 L5_2.1 | length 1521.7
  Top Layer w140: L5_2.1@11320,8146.46 12662.83,8146.46 L2.5
V_termB_3: L2.6 L5_3.1 | length 1774.4
  Top Layer w140: L5_3.1@11320,9386.46 12052.76,9386.46 L2.6
VDC_1: J1.39 J3.06 TP13.1 | length 5440.8
  Top Layer w20: TP13.1 1416.97,11286.97 1416.97,11571.97 J3.06 2165,12320 5030,12320 5630,12920 J1.39
VDC_2: J1.09 J11.06 TP4.1 | length 6027.8
  Top Layer w20: v1(6540,12640) 6790,12390 10360,12390 11010,11740 J11.06 11060,11575 TP4.1
  Bottom Layer w20: J1.09 6380,12786.36 6520.62,12645.74 6534.26,12645.74 v1(6540,12640)
VREF_1: J1.33 J3.20 TP12.1 | length 5314.1
  Top Layer w20: TP12.1 2390,11405 J3.20 2745,12200 4979.9,12200 5062.5,12117.4 5291.04,12117.4 5343.64,12170 5650,12170 5780,12300 J1.33
VREF_2: J1.15 J11.20 TP5.1 | length 6876.7
  Top Layer w20: v1(6270,12810) 6890,12810 7190,12510 10825,12510 J11.20 12010,11325 TP5.1
  Bottom Layer w20: J1.15 6230,12850 v1(6270,12810)
pads on no net: J2.25 J2.27 J2.29 J2.31 J2.37 J2.39 J2.41 J2.42 J2.43 J2.44 J2.46 J2.48 J2.49 J2.50 J3.01 J3.02 J3.03 J3.05 J3.07 J3.08 J3.09 J3.10 J3.11 J3.12 J3.13 J3.15 J3.17 J3.19 J4.04 J4.06 J4.08 J4.10 J4.12 J4.14 J4.15 J4.17 J4.18 J4.19 J4.20 J5.1 J10.1 J11.01 J11.02 J11.03 J11.05 J11.07 J11.08 J11.09 J11.10 J11.11 J11.12 J11.13 J11.15 J11.17 J11.19 J12.04 J12.06 J12.08 J12.10 J12.12 J12.14 J12.15 J12.17 J12.18 J12.19 J12.20 J13.1 J14.1 J15.1 J16.1 J17.1 J18.1 J19.1 J20.1

## Polygon pours and split planes (outlines as drawn)
no net on Bottom Layer "NONET_L02_P003" (solid, pour order 3): 1190,13180 1430,12940 2360,12940 2720,13300 7280,13300 7930,12650 11270,12650 11800,13180 11800,13550 1190,13550
C2_Neut on Bottom Layer "C2_NEUT_L02_P001" (solid, pour order 1): 7438.65,11258.89 7438.65,9758.89 8618.65,8578.89 10598.65,8578.89 10598.65,11258.42 10601.35,11261.11
C1_Neut on Bottom Layer "C1_NEUT_L02_P000" (solid, pour order 0): 7320,11250 7320,9760 6163.04,8603.04 4240,8603.04 4240,11250
AGND on Bottom Layer "AGND_L02_P006" (solid, remove dead copper, pour order 6): 1170,11040 2520,11040 2520,11520 2970,11970 10670,11970 10740,11900 10740,10980 12160,10980 12160,11320 10900,12580 7900,12580 7220,13260 3990,13260 3320,12590 1790,12590 1170,11970
-15V on Bottom Layer "-15V_L02_P004" (solid, pour order 4): 4640,11680 4640,12440 4420,12440 4420,11460 9860,11460 9860,11680
+15V on Top Layer "+15V_L01_P002" (solid, pour order 2): 4760,11470 10140,11470 10140,11680 4760,11680
-15V on Top Layer "tga" (solid, pour order 5): 4640,12350 4640,12770 5010,13140 6630,13140 6630,13290 4810,13290 4420,12900 4420,12350

## Silkscreen, mask and mechanical layers (free items; w line width, h text height)
Top Overlay:
  drawing of 111 lines, arcs and shapes, not listed
  text "LCL2" at 12400,11210 h60
  text "Isolation" at 3780,11170 h60
  text "LCL1" at 2650,11160 h60
  text "Cf_A" at 12537,11054 h42
  text "Cf_A" at 3407,10994 h42
  text "Lf_A" at 12947,10984 h42
  text "VDC" at 1200,10940 h60
  text "I1" at 1490,10940 h60
  text "I2" at 1760,10940 h60
  text "I3" at 2050,10940 h60
  text "VREF" at 2270,10940 h60
  text "Cf_B" at 12597,10924 h42
  text "Lf_A" at 2997,10914 h42
  text "VDC" at 11038.44,10892.15 h60
  text "I1" at 11318.44,10892.15 h60
  text "I2" at 11538.44,10892.15 h60
  text "I3" at 11768.44,10892.15 h60
  text "VREF" at 11990,10890 h60
  text "Cf_B" at 3337,10864 h42
  text "Lf_B" at 12947,10834 h42
  text "L_CM" at 13197,10804 h42
  text "Cf_C" at 12687,10794 h42
  text "Lf_B" at 2997,10764 h42
  text "L_CM" at 2747,10744 h42
  text "Cf_C" at 3267,10734 h42
  text "Lg_A" at 12491,10693 h42 r270
  text "Lg_B" at 12641,10693 h42 r270
  text "Lg_C" at 12801,10693 h42 r270
  text "Lf_C" at 12947,10684 h42
  text "Lg_C" at 3261,10633 h42 r270
  text "Lg_B" at 3411,10633 h42 r270
  text "Lg_A" at 3561,10633 h42 r270
  text "Lf_C" at 2997,10614 h42
  text "C" at 13208.44,9372.15 h60
  text "B" at 13405.29,9372.15 h60
  text "A" at 13602.15,9372.15 h60
  text "B" at 1399,9352.15 h60
  text "A" at 1595.85,9352.15 h60
  text "C" at 1200,9350 h60
  text "BOOSTXL-3PHGANINV Interface Board" at 6662.87,9072.87 h49.21
  text "Imperial College Dept. of EEE" at 6893.94,8987.06 h39.37
  text "FYP for ytc19" at 7213.94,8897.06 h39.37
  text "Ver2.0" at 7343.94,8813.94 h39.37
  text "C B A" at 9140,6800 h60
  text "A B C" at 5400,6760 h60